# EAGLE board RasPi-BplusHAT (EAGLE 8.7.0)
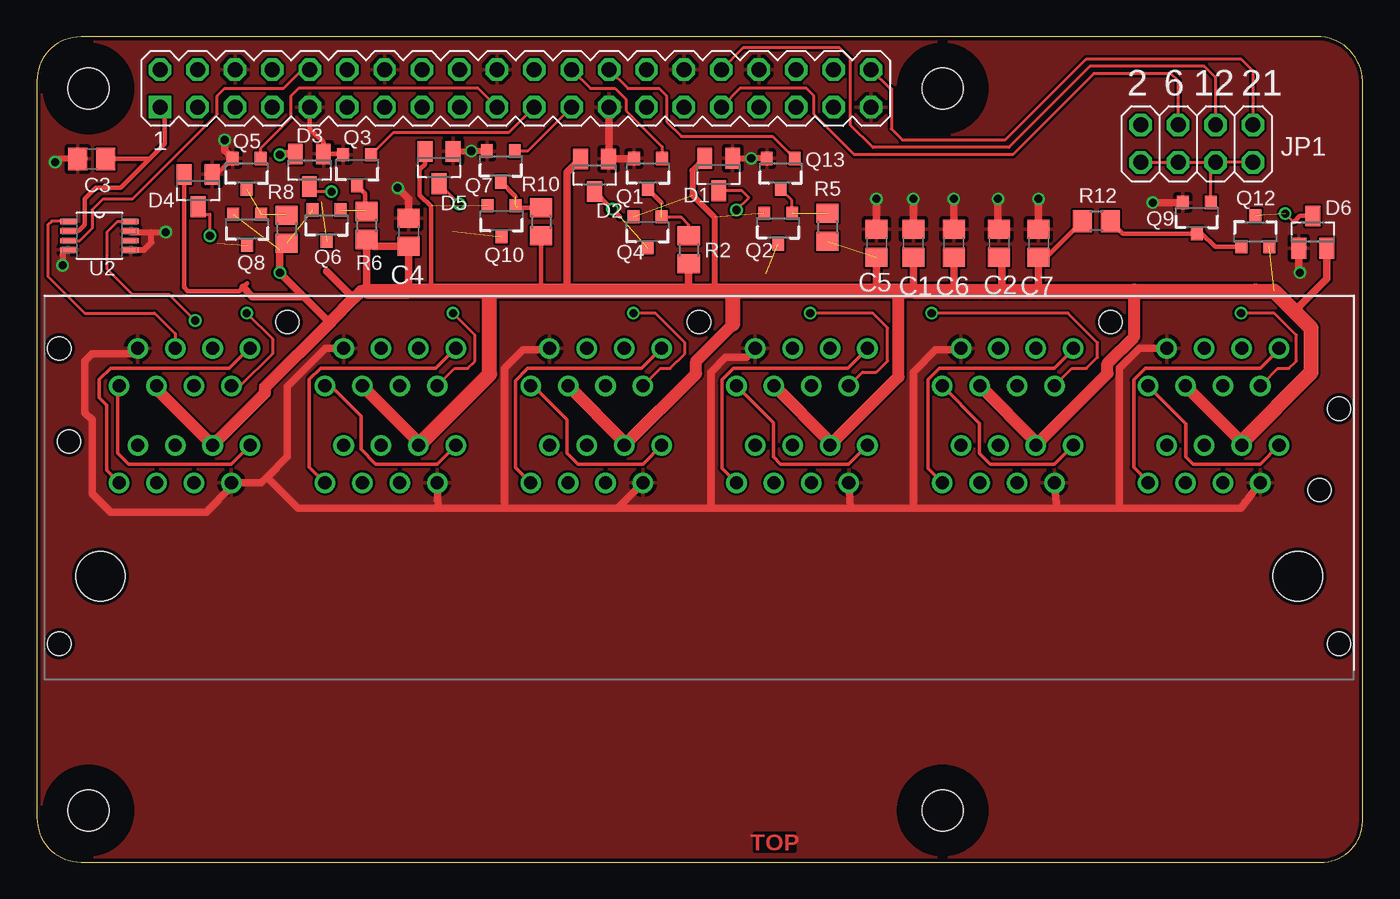
[diagram p0: board, top side]
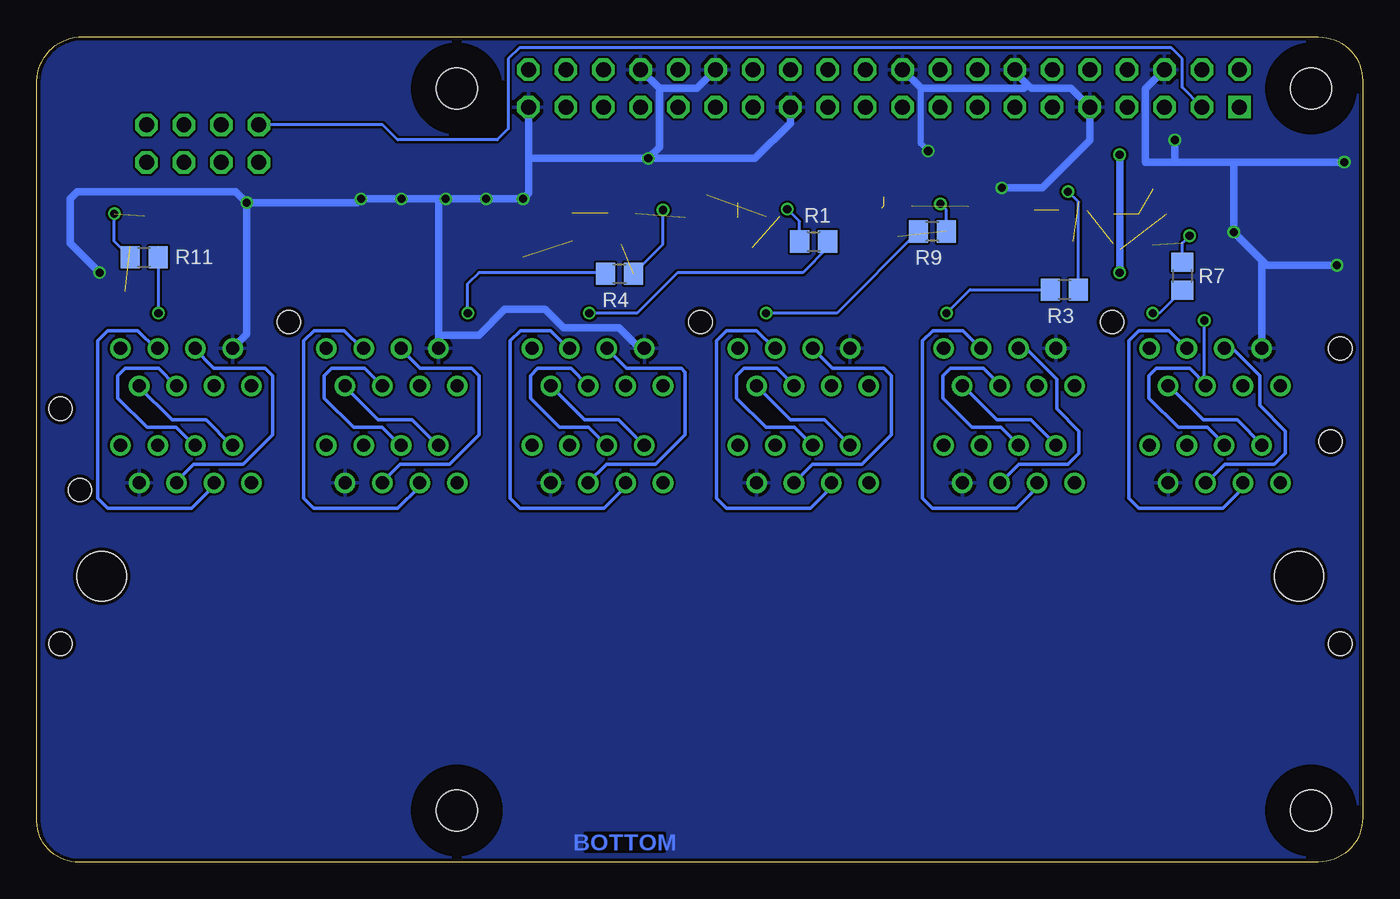
[diagram p1: board, bottom side, seen from below]

Size 90.01 x 56 mm. Coordinates in mm from the lower left corner, seen from the top.
Outline: 0,3 arc90 3,0 87.4,0 arc90 90,3 90,53 arc90 86.89,56 3,56 arc90 0,53 0,3
Copper layers (1*16): Top 0.035mm / dielectric 1.5mm / Bottom 0.035mm
Design rules "ITEADstudio_DRC": minimum track width 6mil, minimum drill 12mil, track to track 6mil, track to pad 6mil, pad to pad 6mil, via to via 6mil, smd to smd 0mil, copper to edge 10mil, drill to drill 10mil, minimum pad ring 10mil, minimum via ring 6mil, stop-mask expansion 2mil, vias tented up to drill 100mil, thermal gap 10mil
Holes 2.8 mm at 3.5,3.5 3.5,52.5 61.5,52.5 61.5,3.5
tRestrict: area 1.9,51 to 5,54; area 60,51 to 63,54; area 60,1.9 to 63,5; area 1.9,1.9 to 5,5
bRestrict: area 1.9,1.9 to 5,5; area 1.9,51 to 5,54; area 60,1.9 to 63,5; area 60,51 to 63,54

## Footprints (pad centres in the part's own frame; a part is rotated, then mirrored left to right if it is on the bottom)
C0805 = smd 1.3 x 1.5: 1 -0.95,0; 2 0.95,0
SOT23 = smd 1 x 1.4: 1 -0.95,-1.1; 2 0.95,-1.1; 3 0,1.1
2X04 = drill 1.016 octagon: 1 -3.81,-1.27; 2 -3.81,1.27; 3 -1.27,-1.27; 4 -1.27,1.27; 5 1.27,-1.27; 6 1.27,1.27; 7 3.81,-1.27; 8 3.81,1.27
PIN_20X2 = drill 1.016 square: 1 -24.13,-1.27 | drill 1.016 octagon: 2 -24.13,1.27; 3 -21.59,-1.27; 4 -21.59,1.27; 5 -19.05,-1.27; 6 -19.05,1.27; 7 -16.51,-1.27; 8 -16.51,1.27; 9 -13.97,-1.27; 10 -13.97,1.27; 11 -11.43,-1.27; 12 -11.43,1.27; 13 -8.89,-1.27; 14 -8.89,1.27; 15 -6.35,-1.27; 16 -6.35,1.27; 17 -3.81,-1.27; 18 -3.81,1.27; 19 -1.27,-1.27; 20 -1.27,1.27; 21 1.27,-1.27; 22 1.27,1.27; 23 3.81,-1.27; 24 3.81,1.27; 25 6.35,-1.27; 26 6.35,1.27; 27 8.89,-1.27; 28 8.89,1.27; 29 11.43,-1.27; 30 11.43,1.27; 31 13.97,-1.27; 32 13.97,1.27; 33 16.51,-1.27; 34 16.51,1.27; 35 19.05,-1.27; 36 19.05,1.27; 37 21.59,-1.27; 38 21.59,1.27; 39 24.13,-1.27; 40 24.13,1.27
SOT23-3 = smd 0.8 x 0.9: 1 -0.95,-1; 2 0.95,-1; 3 0,1.1
R0805 = smd 1.3 x 1.5: 1 -0.95,0; 2 0.95,0
SOP65P490X110-8N = smd 1.067 x 0.356: 1 -2.134,0.965; 2 -2.134,0.33; 3 -2.134,-0.33; 4 -2.134,-0.965; 5 2.134,-0.965; 6 2.134,-0.33; 7 2.134,0.33; 8 2.134,0.965
STEWARTSS73100 = drill 0.889: P$1 1.27,0; P$2 2.54,2.54; P$3 3.81,0; P$4 5.08,2.54; P$5 6.35,0; P$6 7.62,2.54; P$7 8.89,0; P$8 10.16,2.54; P$9 10.16,9.119; P$10 8.89,6.579; P$11 7.62,9.119; P$12 6.35,6.579; P$13 5.08,9.119; P$14 3.81,6.579; P$15 2.54,9.119; P$16 1.27,6.579; P$17 15.24,0; P$18 16.51,2.54; P$19 17.78,0; P$20 19.05,2.54; P$21 20.32,0; P$22 21.59,2.54; P$23 22.86,0; P$24 24.13,2.54; P$25 24.13,9.119; P$26 22.86,6.579; P$27 21.59,9.119; P$28 20.32,6.579; P$29 19.05,9.119; P$30 17.78,6.579; P$31 16.51,9.119; P$32 15.24,6.579; P$33 29.21,0; P$34 30.48,2.54; P$35 31.75,0; P$36 33.02,2.54; P$37 34.29,0; P$38 35.56,2.54; P$39 36.83,0; P$40 38.1,2.54; P$41 38.1,9.119; P$42 36.83,6.579; P$43 35.56,9.119; P$44 34.29,6.579; P$45 33.02,9.119; P$46 31.75,6.579; P$47 30.48,9.119; P$48 29.21,6.579; P$49 43.18,0; P$50 44.45,2.54; P$51 45.72,0; P$52 46.99,2.54; P$53 48.26,0; P$54 49.53,2.54; P$55 50.8,0; P$56 52.07,2.54; P$57 52.07,9.119; P$58 50.8,6.579; P$59 49.53,9.119; P$60 48.26,6.579; P$61 46.99,9.119; P$62 45.72,6.579; P$63 44.45,9.119; P$64 43.18,6.579; P$65 57.15,0; P$66 58.42,2.54; P$67 59.69,0; P$68 60.96,2.54; P$69 62.23,0; P$70 63.5,2.54; P$71 64.77,0; P$72 66.04,2.54; P$73 66.04,9.119; P$74 64.77,6.579; P$75 63.5,9.119; P$76 62.23,6.579; P$77 60.96,9.119; P$78 59.69,6.579; P$79 58.42,9.119; P$80 57.15,6.579; P$81 71.12,0; P$82 72.39,2.54; P$83 73.66,0; P$84 74.93,2.54; P$85 76.2,0; P$86 77.47,2.54; P$87 78.74,0; P$88 80.01,2.54; P$89 80.01,9.119; P$90 78.74,6.579; P$91 77.47,9.119; P$92 76.2,6.579; P$93 74.93,9.119; P$94 73.66,6.579; P$95 72.39,9.119; P$96 71.12,6.579 | hole 3.353: 0,-6.35; 81.28,-6.35 | hole 1.575: -2.134,2.794; -2.794,9.119; -2.794,-10.922; 84.074,-10.922; 82.753,-0.483; 84.074,5.029; 12.7,10.922; 40.64,10.922; 68.58,10.922

## Placement (x,y rotation side)
C1  [C0805]  59.5,42 90 top
C2  [C0805]  65.32,42 90 top
C3  [C0805]  3.73,47.71 180 top
C4  [C0805]  25.25,42.75 90 top
C5  [C0805]  57,42 90 top
C6  [C0805]  62.25,42 90 top
C7  [C0805]  68,42 90 top
D1  BAS40-04  [SOT23]  46.28,46.66 180 top
D2  BAS40-04  [SOT23]  37.86,46.61 180 top
D3  BAS40-04  [SOT23]  18.51,46.95 180 top
D4  BAS40-04  [SOT23]  10.95,45.57 180 top
D5  BAS40-04  [SOT23]  27.3,47.13 180 top
D6  BAS40-04  [SOT23]  86.63,42.75 0 top
JP1  [2X04]  78.75,48.75 0 top
K1  PIN20X2  [PIN_20X2]  32.5,52.5 0 top
Q1  220mA/50V/3.5Ω  [SOT23-3]  41.5,46.75 180 top
Q2  1.1A/60V/600mΩ  [SOT23-3]  50.33,43.04 180 top
Q3  220mA/50V/3.5Ω  [SOT23-3]  21.75,47 180 top
Q4  1.1A/60V/600mΩ  [SOT23-3]  41.46,42.78 180 top
Q5  220mA/50V/3.5Ω  [SOT23-3]  14.25,46.75 180 top
Q6  1.1A/60V/600mΩ  [SOT23-3]  19.67,43.24 180 top
Q7  220mA/50V/3.5Ω  [SOT23-3]  31.5,47.25 180 top
Q8  1.1A/60V/600mΩ  [SOT23-3]  14.27,42.96 180 top
Q9  220mA/50V/3.5Ω  [SOT23-3]  78.75,43.75 180 top
Q10  1.1A/60V/600mΩ  [SOT23-3]  31.55,43.53 180 top
Q12  1.1A/60V/600mΩ  [SOT23-3]  82.71,42.76 0 top
Q13  220mA/50V/3.5Ω  [SOT23-3]  50.5,46.75 180 top
R1  100  [R0805]  37.27,42.11 0 bottom
R2  1k  [R0805]  44.26,41.54 270 top
R3  100  [R0805]  20.24,38.84 180 bottom
R4  100  [R0805]  50.45,39.91 180 bottom
R5  1k  [R0805]  53.67,43.09 270 top
R6  1k  [R0805]  22.39,43.2 270 top
R7  100  [R0805]  12.25,39.76 270 bottom
R8  1k  [R0805]  16.96,42.95 270 top
R9  100  [R0805]  29.21,42.79 180 bottom
R10  1k  [R0805]  34.24,43.45 270 top
R11  100  [R0805]  82.72,41.04 0 bottom
R12  1k  [R0805]  71.93,43.5 180 top
U2  MAX481CUA+  [SOP65P490X110-8N]  4.25,42.5 0 top
U$1  STEWARTSS73100  [STEWARTSS73100]  4.32,25.74 0 top

## Library data of the parts
C1-C7 = rcl; SPICEPREFIX: C
D1-D6 = diode
JP1 = pinhead
K1 = FLYFISH
Q1 Q3 Q5 Q7 Q9 Q13 = SparkFun-DiscreteSemi; PROD_ID: TRANS-00830
Q2 Q4 Q6 Q8 Q10 Q12 = SparkFun-DiscreteSemi; PROD_ID: TRANS-08285
R1-R12 = resistor
U2 = MAX481CUA_; AVAILABILITY: Bad; DESCRIPTION: IC TXRX RS485/RS422 5V 8-UMAX; MF: Maxim Integrated; MP: MAX481CUA+; PACKAGE: MSOP-8 Maxim Integrated; PRICE: 1.77 USD
U$1 = Stewart_Connector_SS73100-046F

## Nets
485+: U2.8 U$1.P$4 U$1.P$12
485-: U2.1 U$1.P$5 U$1.P$13
+3V3: C3.1 K1.1 U2.2
+12V: C1.1 C2.1 C4.1 C5.1 C6.1 C7.1 D1.2 D2.2 D3.2 D4.2 D5.2 D6.2 Q2.2 Q4.2 Q6.2 Q8.2 Q10.2 Q12.2 R2.2 R5.2 R6.2 R8.2 R10.2 R12.2 U$1.P$6 U$1.P$14 U$1.P$22 U$1.P$30 U$1.P$38 U$1.P$46 U$1.P$54 U$1.P$62 U$1.P$70 U$1.P$78 U$1.P$86 U$1.P$94
GND: C1.2 C2.2 C3.2 C4.2 C5.2 C6.2 C7.2 D1.1 D2.1 D3.1 D4.1 D5.1 D6.1 K1.6 K1.9 K1.14 K1.20 K1.25 K1.30 K1.34 K1.39 Q1.2 Q3.2 Q5.2 Q7.2 Q9.2 Q13.2 U2.4 U2.5 U2.7 U$1.P$7 U$1.P$15 U$1.P$23 U$1.P$31 U$1.P$39 U$1.P$47 U$1.P$55 U$1.P$63 U$1.P$71 U$1.P$79 U$1.P$87 U$1.P$95
GPIO02: JP1.2 K1.3
GPIO06: JP1.4 K1.31
GPIO07: K1.26 Q13.1
GPIO08: K1.24 Q1.1
GPIO09: K1.21 Q3.1
GPIO10: K1.19 Q5.1
GPIO11: K1.23 Q7.1
GPIO12: JP1.6 K1.32
GPIO21: JP1.8 K1.40
GPIOSEL: JP1.1 JP1.3 JP1.5 JP1.7 Q9.1
N$1: Q1.3 Q4.1 R2.1
N$2: D2.3 Q4.3 R1.1
N$3: Q3.3 Q6.1 R6.1
N$4: Q2.1 Q13.3 R5.1
N$5: D1.3 Q2.3 R4.1
N$6: D3.3 Q6.3 R3.1
N$7: Q5.3 Q8.1 R8.1
N$8: D4.3 Q8.3 R7.1
N$9: Q7.3 Q10.1 R10.1
N$10: D5.3 Q10.3 R9.1
N$11: Q9.3 Q12.1 R12.1
N$12: D6.3 Q12.3 R11.1
N$13: U$1.P$1 U$1.P$9
N$15: U$1.P$3 U$1.P$11
N$17: U2.6
N$21: U$1.P$17 U$1.P$25
N$23: U$1.P$19 U$1.P$27
N$24: U$1.P$20 U$1.P$28
N$25: U$1.P$21 U$1.P$29
N$29: U$1.P$33 U$1.P$41
N$31: U$1.P$35 U$1.P$43
N$32: U$1.P$36 U$1.P$44
N$33: U$1.P$37 U$1.P$45
N$36: U$1.P$8 U$1.P$16
N$37: U$1.P$49 U$1.P$57
N$39: U$1.P$51 U$1.P$59
N$40: U$1.P$52 U$1.P$60
N$41: U$1.P$53 U$1.P$61
N$45: U$1.P$65 U$1.P$73
N$47: U$1.P$67 U$1.P$75
N$48: U$1.P$68 U$1.P$76
N$49: U$1.P$69 U$1.P$77
N$53: U$1.P$81 U$1.P$89
N$55: U$1.P$83 U$1.P$91
N$56: U$1.P$84 U$1.P$92
N$57: U$1.P$85 U$1.P$93
N$61: U$1.P$24 U$1.P$32
N$62: U$1.P$40 U$1.P$48
N$63: U$1.P$56 U$1.P$64
N$64: U$1.P$72 U$1.P$80
N$65: U$1.P$88 U$1.P$96
RXI: K1.10 U2.3
ZONE1: R7.2 U$1.P$2 U$1.P$10
ZONE2: R3.2 U$1.P$18 U$1.P$26
ZONE3: R9.2 U$1.P$34 U$1.P$42
ZONE4: R1.2 U$1.P$50 U$1.P$58
ZONE5: R4.2 U$1.P$66 U$1.P$74
ZONE6: R11.2 U$1.P$82 U$1.P$90

## Tracks (layer width: path | path; a pad name or v marks a point on that pad's centre or on a via)
485+  (via drill 0.55)
  Top 0.203: U2.8 5.46,43.47 4.75,42.75 4.75,40.25 6.5,38.5 9,38.5 v10.75,36.75
  Bottom 0.203: U$1.P$12 10.75,32.4 v10.75,36.75
  Bottom 0.254: 10.61,32.31 10.61,32.36 11.75,33.5 14,33.5 14.5,33 14.5,31.49 12.51,29.5 10.56,29.5 9.34,28.28
  Bottom 0.305: U$1.P$4 9.34,28.28 | U$1.P$12 10.61,32.31
485-
  Top 0.203: U2.1 2.08,43.5 1,43.5 0.75,43.25 0.75,39.75 3.25,37.25 8,37.25 9.4,35.85 U$1.P$13
  Bottom 0.152: 10.61,25.91 10.61,25.74
  Bottom 0.254: 10.61,25.74 9.34,27 6,27 5.25,27.75 5.25,29.25 7,31 7,33 8.86,34.85 U$1.P$13
  Bottom 0.305: U$1.P$5 10.61,25.74
+3V3
  Top 0.305: K1.1 8.68,50.92 8.68,48.75 7.59,47.66 | 7.59,47.66 5.68,45.75 4,45.75 3.25,45 3.25,43.25 2.83,42.83 U2.2 | C3.1 7.54,47.71 7.59,47.66
+12V  (via drill 0.55)  (7 unrouted)
  Top 0.305: 34.17,42.43 R10.2 34.24,38.76 34.25,38.75 | 22.29,42.14 R6.2 | 82.71,38.79 82.75,38.75 | 49.08,38.92 49.25,38.75 | 28.67,38.83 28.75,38.75 | 35.3,39.05 35,38.75 | 16.82,41.86 R8.2 | D4.2 10,39 10.25,38.75 13.75,38.75 14,39 14.27,39.27 | 53.47,41.94 R5.2 | 50.33,38.92 50.5,38.75 | R12.2 68.53,41.05 C7.1 | D5.2 26.35,47.35 26,47 26,45.25 26.75,44.5 26.75,38.75
  Top 0.406: D1.2 44.5,46.92 44.5,45.25 46,43.75 46,38.75
  Top 0.508: 25.25,38.75 C4.1 22.84,41.8 R6.2 22.39,39.14 22,38.75 | 41.46,38.79 41.5,38.75 | R2.2 44.25,38.75 | C5.1 57,38.75 | C1.1 59.5,38.75 | C6.1 62.25,38.75 | C2.1 65.5,40.86 65.5,38.75 | C7.1 68,38.75 | D6.2 87.58,39.58 85.38,37.38 | D2.2 36,46.8 36,38.75 | D3.2 16.55,48.05 v16.5,48 | 18.12,38.38 v16.5,40 16.5,41.54 R8.2 | 18.12,38.38 19.75,36.75 20,36.75 | 14,39 14.62,38.38 18.12,38.38 | 19.67,40.08 21.5,38.25
  Top 0.813: U$1.P$14 8.13,32.09 U$1.P$6 15.5,31.84 15.5,32.25 20,36.75 21.5,38.25 22,38.75 22.41,38.75 | U$1.P$30 25.91,28.5 U$1.P$22 | U$1.P$46 39.88,28.5 U$1.P$38 44.75,33.15 44.75,34 47.25,36.5 | U$1.P$62 53.85,28.5 U$1.P$54 58.5,32.93 58.5,38.75 | U$1.P$78 67.82,28.5 U$1.P$70 72.69,33.15 72.69,33.84 74.5,35.65 74.5,38.75 | U$1.P$94 81.79,28.5 U$1.P$86
  Top 1.016: U$1.P$22 30.75,33.12 30.75,38.75 | 47.25,38.75 49.25,38.75 50.5,38.75 57,38.75 58.5,38.75 59.5,38.75 62.25,38.75 65.5,38.75 68,38.75 74.5,38.75 82.75,38.75 84,38.75 85.38,37.38 86.5,36.25 86.5,33.22 81.79,28.5 | 47.25,38.75 46,38.75 44.25,38.75 41.5,38.75 36,38.75 35,38.75 34.25,38.75 30.75,38.75 | 30.75,38.75 28.75,38.75 26.75,38.75 25.25,38.75 22.41,38.75 | 47.25,36.5 47.25,38.75
  Bottom 0.508: v16.5,48 v16.5,40
GND  (via drill 0.55)
  Top 0.305: K1.9 18.53,49.77 19.46,48.84 D3.1 20.75,48.05 Q3.2 | K1.25 39.52,51.23 | D4.1 12.22,46.67 Q5.2
  Top 0.406: C3.2 1.46,47.71 v1.25,47.5 | U2.4 arc90 1.75,41.17 v1.75,40.5 | U2.5 7.29,41.53 7.78,42.03 7.78,42.75 | U2.7 6.46,42.75 7.78,42.75 | 7.78,42.75 v8.75,42.75 | Q13.2 v48.5,47.75 v48.49,47.76 D1.1 | D5.1 29.48,48.23 | 29.48,48.23 v29.5,48.25 | Q7.2 30.53,48.23 29.48,48.23
  Top 0.508: Q9.2 v75.75,44.75 | C4.2 25.25,45 v24.5,45.75 | K1.25 38.85,47.75 D2.1 40.51,47.71 Q1.2 | C5.2 v57,45 | C1.2 v59.5,45 | C6.2 v62.25,45 | C2.2 65.25,43.01 v65.25,45 | C7.2 v68,45 | D6.1 85.68,40.07 v85.75,40 | U$1.P$15 6.5,34.5 3.75,34.5 3.25,34 3.25,30.5 3.75,30 3.75,25 5,23.75 11.5,23.75 13.21,25.46 U$1.P$7 15.24,25.74 15.62,26.12 | 15.62,26.12 17,27.5 17,32.25 19.61,34.85 U$1.P$31 | 15.62,26.12 17.75,24 27.25,24 | U$1.P$39 39.41,24 | 39.41,24 31.75,24 | 31.75,24 27.25,24 | U$1.P$23 27.25,24 | U$1.P$55 55.25,24 | 55.25,24 45.75,24 | 45.75,24 39.41,24 | U$1.P$87 81.75,24 73.5,24 | 73.5,24 69.25,24 | 69.25,24 59.5,24 | 59.5,24 55.25,24 | U$1.P$71 69.25,24 | U$1.P$47 34.69,34.75 33,34.75 31.75,33.5 31.75,24 | U$1.P$63 48.16,34.25 46.75,34.25 45.75,33.25 45.75,24 | U$1.P$79 62.63,34.75 61,34.75 59.5,33.25 59.5,24 | U$1.P$95 74.86,34.85 73.5,33.5 73.5,24 | Q5.2 12.75,48.3 v12.75,49
  Bottom 0.406: v29.5,48.25 30,48.75 30,52.54
  Bottom 0.508: K1.6 14.75,52.47 14.75,47.5 12.75,47.5 | v24.5,45.75 21.75,45.75 18.53,48.97 K1.9 19.8,52.5 22.5,52.5 22.75,52.75 | v1.25,47.5 8.75,47.5 | 8.75,47.5 12.75,47.5 | 8.75,47.5 v8.75,42.75 6.75,40.75 | v1.75,40.5 6.5,40.5 6.75,40.75 | U$1.P$15 6.86,40.64 6.75,40.75 | K1.34 47.75,52.5 | v48.5,47.75 47.75,48.5 47.75,52.5 | K1.39 56.63,47.75 | 56.63,47.75 56.63,45.37 v57,45 v59.5,45 v62.25,45 62.75,45 | 62.75,45 v65.25,45 v68,45 68.25,44.75 v75.75,44.75 | v85.75,40 87.75,42 87.75,45 87.25,45.5 76.5,45.5 v75.75,44.75 | v75.75,44.75 75.75,35.81 U$1.P$95 | U$1.P$79 62.74,35.75 | 62.74,35.75 62.74,44.99 62.75,45 | U$1.P$63 49.1,34.85 50.5,36.25 54.25,36.25 55.5,37.5 58.25,37.5 60,35.75 62.74,35.75 | v48.5,47.75 56.63,47.75 | K1.30 45.2,52.5 47.75,52.5 | K1.25 38.85,50.15 41.25,47.75 v48.5,47.75 | 22.75,52.75 23.61,53.61 K1.14 | K1.20 30,52.54 30,52.5 23,52.5 22.75,52.75 | v12.75,49 12.75,47.5
  pour Bottom: 0,2.49 arc90 3,0 87.4,0 arc90 90,3 90,53 arc90 86.89,56 3,56 arc90 0,52.49
  pour Top: 0,1.98 arc90 3,0 87.4,0 arc90 90,3 90,53 arc90 86.89,56 3,56 arc90 0,51.98
GPIO02
  Bottom 0.203: K1.3 12.25,52.57 12.25,54.5 13,55.25 57.25,55.25 58,54.5 58,49.75 58.75,49 65.5,49 66.52,50.02 JP1.2
GPIO06
  Top 0.203: JP1.4 77.48,53.02 77,53.5 71.75,53.5 66.25,48 55.5,48 52.75,50.75 52.75,52 52.25,52.5 47.74,52.5 K1.31
GPIO07
  Top 0.203: K1.26 40.12,52.5 42.25,52.5 42.75,52 42.75,50.25 43.75,49.25 49.95,49.25 Q13.1
GPIO08
  Top 0.203: Q1.1 42.45,48.55 40,51 40,51.75 39.25,52.5 37.58,52.5 K1.24
GPIO09
  Top 0.203: 33.18,51.23 K1.21 32.04,49.5 24.2,49.5 Q3.1
GPIO10
  Top 0.203: K1.19 29.96,52.5 17.76,52.5 17.4,52.13 17.38,52.13 17.25,52 17.25,50.5 15.2,48.45 Q5.1 15,47.95
GPIO11
  Top 0.203: 36.2,51.12 K1.23 33.33,48.25 Q7.1
GPIO12
  Top 0.203: JP1.6 80.02,53.23 79.25,54 71.5,54 66,48.5 56.75,48.5 55.25,50 55.25,54.5 54.5,55.25 47.95,55.25 K1.32
GPIO21
  Top 0.203: K1.40 57.9,52.5 58,52.5 58,49.75 58.75,49 65.75,49 71.25,54.5 81.75,54.5 82.56,53.69 JP1.8
GPIOSEL
  Top 0.203: JP1.1 JP1.3 JP1.5 80.25,47.48 | JP1.7 80.25,47.48 | Q9.1 79.7,46.93 80.25,47.48
N$1  (2 unrouted)
  Top 0.203: R2.1 44.26,43.24 43.75,43.75 42.44,43.75
  Top 0.305: Q1.3 42.41,44.74
N$2  (via drill 0.55)  (1 unrouted)
  Top 0.305: D2.3 v39.06,44.31 39.59,43.78
  Bottom 0.203: R1.1 38.22,43.47 v39.06,44.31
N$3  (1 unrouted)
  Top 0.305: R6.1 22.3,44.24 22.3,45.35 Q3.3
N$4  (2 unrouted)
  Top 0.203: Q13.3 51.25,44.9 51.25,44.07
N$5  (via drill 0.55)  (1 unrouted)
  Top 0.203: D1.3 47.86,45.56 48.33,45.08 v47.5,44.25
  Bottom 0.203: R4.1 47.5,41.91 v47.5,44.25
N$6  (via drill 0.55)  (1 unrouted)
  Top 0.203: v20,45.5 18.72,45.5
  Top 0.305: D3.3 18.72,45.64 18.72,45.5
  Bottom 0.203: R3.1 19.29,44.79 v20,45.5
N$7  (2 unrouted)
  Top 0.305: 16.91,43.96 R8.1
N$8  (via drill 0.55)  (1 unrouted)
  Top 0.203: D4.3 11.45,43.96 11.75,43.96 v11.75,42.5
  Top 0.305: D4.3 10.95,44.05
  Bottom 0.203: R7.1 12.25,42.01 v11.75,42.5
N$9  (2 unrouted)
  Top 0.305: Q7.3 32.5,45.15 | 32.63,44.4 R10.1
N$10  (via drill 0.55)  (1 unrouted)
  Top 0.203: D5.3 v28.66,44.66 28.8,44.53
  Bottom 0.203: R9.1 28.26,44.26 v28.66,44.66
N$11  (1 unrouted)
  Top 0.305: Q12.1 80,41.75 79.1,42.65 Q9.3 73.73,42.65 R12.1
N$12  (via drill 0.55)  (1 unrouted)
  Top 0.203: v84.75,44 85.33,43.42
  Top 0.305: 85.33,43.42 85.75,43.85 D6.3
  Bottom 0.203: R11.1 84.75,42.12 v84.75,44
N$13
  Top 0.254: 14.42,34.85 13.06,33.5 5,33.5 4.25,32.75 4.25,31.5 4.75,31 4.75,26.57 U$1.P$1
  Top 0.305: U$1.P$9 14.42,34.85
N$15
  Bottom 0.152: U$1.P$11 11.88,34.85
  Bottom 0.254: U$1.P$11 13.15,36.07 15.18,36.07 15.88,35.37 15.88,24.68 15.2,24 9.5,24 8.07,25.43 8.07,25.74 U$1.P$3
  Bottom 0.305: U$1.P$11
N$21
  Top 0.254: 28.42,34.85 27.06,33.5 19.25,33.5 18.5,32.75 18.5,26.79 U$1.P$17
  Top 0.305: U$1.P$25 28.42,34.85
N$23
  Bottom 0.152: 25.93,34.85 25.88,34.85
  Bottom 0.254: 22.07,25.74 22.07,25.43 23.5,24 29.2,24 29.88,24.68 29.88,35.37 29.18,36.07 27.15,36.07 25.93,34.85 U$1.P$27
  Bottom 0.305: U$1.P$19 22.07,25.74
N$24
  Bottom 0.254: 24.61,32.31 24.61,32.36 25.75,33.5 28,33.5 28.5,33 28.5,31.49 26.51,29.5 24.56,29.5 23.34,28.28
  Bottom 0.305: U$1.P$20 23.34,28.28 | U$1.P$28 24.61,32.31
N$25
  Bottom 0.152: 24.61,25.91 24.61,25.74
  Bottom 0.254: 24.61,25.74 23.34,27 20,27 19.25,27.75 19.25,29.25 20.75,30.75 20.75,32.75 22.86,34.85 23.34,34.85
  Bottom 0.305: U$1.P$21 24.61,25.74 | U$1.P$29 23.34,34.85
N$29
  Top 0.254: U$1.P$41 41.06,33.5 33.33,33.5 32.5,32.67 32.5,26.76 U$1.P$33
N$31
  Bottom 0.152: 39.94,34.85 U$1.P$43
  Bottom 0.254: 39.94,34.85 41.15,36.07 43.18,36.07 43.88,35.37 43.88,24.68 43.2,24 37.5,24 36.07,25.43 U$1.P$35
N$32
  Bottom 0.254: U$1.P$44 38.61,32.36 39.75,33.5 42,33.5 42.5,33 42.5,31.49 40.51,29.5 38.56,29.5 U$1.P$36
N$33
  Bottom 0.152: 38.61,25.91 U$1.P$37
  Bottom 0.254: U$1.P$37 37.34,27 34,27 32,29 32,33 | 32,33 31.99,33.01 | U$1.P$45 36,33.52 | 36,33.52 36,33.5 | 32,33 32.5,33.5 35.98,33.5 36,33.52
N$36
  Top 0.254: U$1.P$16 5.5,32.23 5.5,27.75 6.25,27 13.2,27 U$1.P$8
N$37
  Top 0.254: 56.42,34.85 55.06,33.5 47.3,33.5 46.52,32.72 46.52,32.52 46.5,32.5 46.5,26.73 U$1.P$49
  Top 0.305: U$1.P$57 56.42,34.85
N$39
  Bottom 0.152: 53.94,34.85 53.88,34.85
  Bottom 0.254: 53.94,34.85 55.15,36.07 57.18,36.07 57.88,35.37 57.88,24.68 57.2,24 51.5,24 50.07,25.43 50.07,25.74
  Bottom 0.305: U$1.P$59 53.94,34.85 | U$1.P$51 50.07,25.74
N$40
  Bottom 0.254: 51.34,28.28 52.56,29.5 54.51,29.5 56.5,31.49 56.5,33 56,33.5 53.75,33.5 52.61,32.36 52.61,32.31 U$1.P$60
  Bottom 0.305: U$1.P$52 51.34,28.28
N$41
  Bottom 0.152: 52.61,25.91 52.61,25.74
  Bottom 0.254: 52.61,25.74 51.34,27 48,27 46,29 46,33.25 46.25,33.5 49.98,33.5 51.24,34.76 51.31,34.83 | 51.31,34.83 51.34,34.85 | U$1.P$61 51.31,34.83
  Bottom 0.305: U$1.P$53 52.61,25.74
N$45
  Top 0.254: 70.42,34.85 69.06,33.5 61.27,33.5 60.49,32.72 60.49,26.71 U$1.P$65
  Top 0.305: U$1.P$73 70.42,34.85
N$47
  Bottom 0.152: 67.88,34.85 67.94,34.85
  Bottom 0.254: 67.94,34.85 69.15,36.07 71.18,36.07 71.88,35.37 71.88,24.68 71.2,24 65.5,24 64.07,25.43 64.07,25.74
  Bottom 0.305: U$1.P$67 64.07,25.74 | U$1.P$75 67.88,34.85
N$48
  Bottom 0.254: 65.34,28.28 66.56,29.5 68.51,29.5 70.5,31.49 70.5,33 70,33.5 67.75,33.5 66.61,32.36 66.61,32.31 U$1.P$76
  Bottom 0.305: U$1.P$68 65.34,28.28
N$49
  Bottom 0.152: 66.61,25.91 66.61,25.74
  Bottom 0.254: 66.61,25.74 65.34,27 62,27 60,29 60,33 | 60,33 59.99,33.01 | 64,33.52 65.34,34.85 U$1.P$77 | 64,33.52 64,33.5 | 60,33 60.5,33.5 63.98,33.5 64,33.52
  Bottom 0.305: U$1.P$69 66.61,25.74
N$53
  Top 0.254: U$1.P$81 75.44,25.81 74.46,26.79 74.46,32.72 75.24,33.5 83.06,33.5 84.42,34.85 U$1.P$89
N$55
  Bottom 0.152: 81.94,34.85 81.88,34.85
  Bottom 0.254: 81.94,34.85 83.15,36.07 85.18,36.07 85.88,35.37 85.88,24.68 85.2,24 79.5,24 78.07,25.43 78.07,25.74 U$1.P$83
  Bottom 0.305: U$1.P$91 81.94,34.85
N$56
  Bottom 0.254: 80.61,32.31 80.61,32.36 81.75,33.5 84,33.5 84.5,33 84.5,31.49 82.51,29.5 80.56,29.5 79.34,28.28 U$1.P$84
  Bottom 0.305: U$1.P$92 80.61,32.31
N$57
  Bottom 0.152: 80.61,25.91 80.61,25.74
  Bottom 0.254: 80.61,25.74 79.34,27 76,27 74,29 74,33 | 74,33 73.99,33.01 | 78,33.52 79.34,34.85 U$1.P$93 | 78,33.52 78,33.5 | 74,33 74.5,33.5 77.98,33.5 78,33.52
  Bottom 0.305: U$1.P$85 80.61,25.74
N$61
  Top 0.254: U$1.P$24 27.17,27 23,27 22,28 22,30.25 19.93,32.31 U$1.P$32 19.5,32.26
N$62
  Top 0.254: U$1.P$40 41.14,27 36.75,27 36,27.75 36,30 33.69,32.31 U$1.P$48
N$63
  Top 0.254: U$1.P$56 55.11,27 50.5,27 50,27.5 50,29.81 U$1.P$64
N$64
  Top 0.254: 61.5,32.28 U$1.P$80 64,29.78 64,27.75 64.75,27 69.08,27 U$1.P$72
N$65
  Top 0.254: U$1.P$88 83.05,27 78.5,27 78,27.5 78,29.75 U$1.P$96
RXI
  Top 0.203: U2.3 2.92,42.17 3.75,43 3.75,44.25 4.5,45 6.5,45 12.25,50.75 12.25,52 12.75,52.5 16.75,52.5 18.02,53.77 K1.10
ZONE1  (via drill 0.55)
  Top 0.203: v14.25,37.25 16,35.5 16,34.5 13.75,32.25 13.27,32.25 U$1.P$10
  Bottom 0.203: R7.2 13.81,37.25 v14.25,37.25
  Bottom 0.254: 6.8,28.28 8.52,30 10.83,30 13.15,32.31
  Bottom 0.305: U$1.P$10 13.15,32.31 | U$1.P$2 6.8,28.28
ZONE2  (via drill 0.55)
  Top 0.203: U$1.P$26 28.36,33.5 29.25,33.5 29.75,34 29.75,35.75 v28.25,37.25
  Bottom 0.203: v28.25,37.25 26.66,38.84 R3.2
  Bottom 0.254: 20.8,28.28 22.52,30 24.83,30 27.15,32.31 U$1.P$26
  Bottom 0.305: U$1.P$18 20.8,28.28
ZONE3  (via drill 0.55)
  Top 0.203: U$1.P$42 42.33,33.5 43,33.5 44,34.5 44,35.25 42,37.25 v40.5,37.25
  Bottom 0.203: R9.2 35.7,37.25 v40.5,37.25
  Bottom 0.254: U$1.P$34 36.52,30 38.83,30 U$1.P$42
ZONE4  (via drill 0.55)
  Top 0.203: U$1.P$58 56.05,33.25 57,33.25 57.75,34 57.75,36.25 56.75,37.25 v52.5,37.25
  Bottom 0.203: R1.2 36.32,41.68 38,40 46.5,40 49.25,37.25 v52.5,37.25
  Bottom 0.254: 48.8,28.28 50.52,30 52.83,30 55.15,32.31 U$1.P$58
  Bottom 0.305: U$1.P$50 48.8,28.28
ZONE5  (via drill 0.55)
  Top 0.203: U$1.P$74 70.27,33.5 71.25,33.5 72,34.25 72,35.25 70,37.25 v60.75,37.25
  Bottom 0.203: v60.75,37.25 60.75,39.25 60,40 51.48,40 R4.2
  Bottom 0.254: 69.15,32.31 66.83,30 64.52,30 62.8,28.28 U$1.P$66
  Bottom 0.305: U$1.P$74 69.15,32.31
ZONE6  (via drill 0.55)
  Top 0.203: 83.25,32.5 84.24,33.5 85,33.5 85.5,34 85.5,35.75 84,37.25 v81.75,37.25
  Top 0.254: U$1.P$90 83.25,32.5
  Bottom 0.203: R11.2 81.77,37.27 v81.75,37.25
  Bottom 0.254: 76.8,28.28 78.52,30 80.83,30 83.15,32.31 U$1.P$90
  Bottom 0.305: U$1.P$82 76.8,28.28

## Text on the board
Top: TOP
Bottom: BOTTOM
tSilk: 2 | 6 | 12 | 21